# Altium PCB DoorComponantsTest.PcbDoc (part 2 of 2)
Units mil, origin at the board's own origin, x right, y up, seen from the top; angles counter-clockwise.
Board outline 6000 x 4000 mil, 2 copper layers (Top Layer, Bottom Layer); 88 components, 87 nets, 339 pads, 0 vias.
Unrouted connection lines stored in the file: 220.
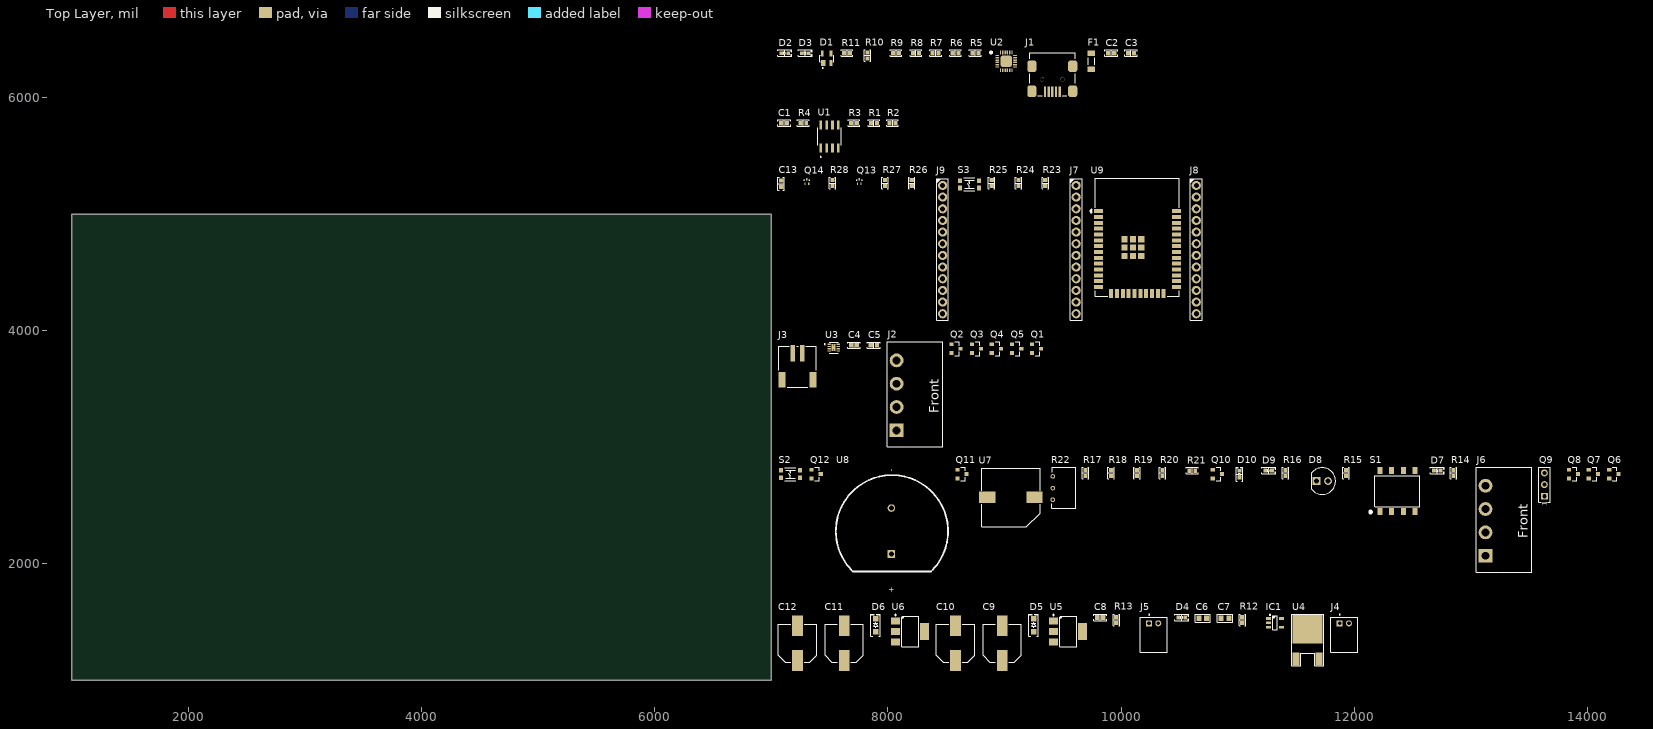
[diagram p0: Top Layer view]

## Part data (continued)
U5 U6: "IC REG LINEAR 3.3V 800MA SOT223", Current - Output=800mA, Current - Quiescent (Iq)="10 mA", manufacturer=STMicroelectronics, Operating Temperature="0°C ~ 125°C", Package / Case="TO-261-4, TO-261AA", Supplier Device Package=SOT-223, Supplier Part Number 1=497-1242-1-ND, Voltage - Input (Max)=15V, Voltage - Output (Min/Fixed)=3.3V, Voltage Dropout (Max)="1.2V @ 800mA", componentlink1description=Datasheet, componentlink1url=http://www.st.com/content/ccc/resource/technical/document/datasheet/99/3b/7d/91/91/51/4b/be/CD00000544.pdf/files/CD00000544.pdf/jcr:content/translations/en.CD00000544.pdf, componentlink2description="DigiKey Link", componentlink2url=https://www.digikey.com/en/products/detail/stmicroelectronics/LD1117S33TR/585766, lastupdated="2023-03-27 20:01:10", Lifecycle Status=Active, Minimum Order=1, Mounting Type="Surface Mount", Number of Regulators=1, Output Configuration=Positive, Output Type=Fixed, packaging=TapeAndReel, Part Number=LD1117S33TR, Part Status=Active, price=0.21, Protection Features="Over Current, Over Temperature", PSRR="75dB (120Hz)", series=-, Supplier 1=DigiKey
U7: "AUDIO MAGNETIC XDCR 3-7V SMD", Current - Supply=60mA, Frequency=2.4kHz, manufacturer="CUI Devices", Operating Mode="Single Tone", Operating Temperature="-30°C ~ 70°C", Ratings=Washable, Supplier Part Number 1=102-1266-1-ND, Voltage - Rated=5V, Voltage Range="3 ~ 7V", componentlink1description=Datasheet, componentlink1url=https://www.cuidevices.com/product/resource/digikeypdf/ct-1205h-smt-tr.pdf, componentlink2description="DigiKey Link", componentlink2url=http://digikey.com/product-detail/en/cui-devices/CT-1205H-SMT-TR/102-1266-1-ND/610974, Driver Circuitry="Transducer, Externally Driven", Height - Seated (Max)="0.406\" (10.30mm)", Input Type="Zero-Peak Signal", lastupdated="2020-04-24 00:37:20", Lifecycle Status=Active, Minimum Order=1, Mounting Type="Surface Mount", packaging=TapeAndReel, Part Number=CT-1205H-SMT-TR, Part Status=Active, Port Location=Top, price=0.95, series=CT, Size / Dimension="0.504\" L x 0.504\" W (12.80mm x 12.80mm)", Sound Pressure Level (SPL)="88dB @ 5V, 10cm", Supplier 1=DigiKey, Technology=Magnetic, Termination="Solder Pads"
U8: library part CMP-00124-2, "Buzzers Transducer, Externally Driven Piezo 10 V 11mA 92dB @ 10V, 10cm Through Hole PC Pins", Manufacturer Part Number 1=CEP-1112
U9: "No Description Available", Manufacturer Part Number=ESP32-WROOM-32D-N4, Mfr_Name="Espressif Systems", Copyright="Copyright (C) 2023 Ultra Librarian. All rights reserved.", Manufacturer_Part_Number="ESP32-WROOM-32 (8MB)", RefDes=RefDes, Type=DEV

## Nets (pads, with @x,y where several pads share a name; then routed paths per layer and width w, separated by ;. In a path a pad name is that pad's centre, name@x,y a point inside that pad or via, vN(x,y) a via of type N, cw(c..) or ccw(c..) an arc to the next point about the centre after c; other vN are vias at no path point)
3V: C2.2 C12.1 R5.1 R8.2 R9.2 R14.2 R15.2 R16.2 R17.2 R18.2 R21.2 U2.5 U2.6 U6.2 U6.4
5V: C1.2 R1.2 R2.2 R3.2 U1.8
12V: C6.2 J5.1 Q1.3 R19.2 S1.1 U4.1
+5: C8.2 IC1.2
+5V: C4.2 C5.2 C7.2 D5.1 D6.1 D8.2 IC1.3 J4.1 Q9.3 R20.2 R23.2 U4.3
BUZZER_EA: J7.6 Q11.1 R18.1 U9.14
CHR0: U2.15
CHR1: D2.2 U2.14
CHREN: D3.2 U2.13
CLK: J7.4 J8.3 U9.26
DSR: Q14.2 R10.1 R10.2 R27.1 U2.22
DTR: Q13.2 R7.1 R7.2 R28.1 U2.23
ESP_EN: J9.1 R24.1 S3.3 S3.4 U9.3
GND: C1.1 C2.1 C3.1 C4.1 C5.1 C6.1 C7.1 C8.1 C9.2 C10.2 C11.2 C12.2 C13.1 D1.1 J1.5 J4.2 J5.2 Q6.2 Q7.2 Q8.2 Q9.2 Q10.2 Q12.2 R4.1 R11.1 R13.1 R25.1 S2.1 S2.2 S3.1 S3.2 U1.4 U2.2 U2.25 U3.1 U3.4 U3.8 U4.2 U5.1 U6.1 U7.- U8.N U9.1 U9.15 U9.38 U9.39
GPIO0: J7.2 R26.2 U9.25
GPO: R1.1 U1.7
INFRA_R: J7.5 J8.4 Q9.1 U9.29
INFRA_T: J7.3 Q10.1 U9.24
IO35: J8.11 R23.1 R25.2 U9.7
LED_B_CTRL: D10.2 J7.9 Q8.1 U9.23
LED_G_CTRL: D9.2 J7.8 Q7.1 U9.13
LED_R_CTRL: D7.2 J7.7 Q6.1 U9.16
MISO: J8.2 U9.31
MOSI: J7.12 J8.1 U9.30
MPAP_C1: Q5.1 U3.6 U9.33
MPAP_C2: Q4.1 U3.5 U9.36
MPAP_C3: Q3.1 U9.37
MPAP_C4: Q2.1 U9.10
MTR_EA: J8.7 Q1.1 U3.7 U9.11
NetC9_1: C9.1 D5.2 U5.3
NetC11_1: C11.1 D6.2 U6.3
NetD1_3: D1.3 J1.2 U2.4
NetD1_4: D1.4 J1.3 U2.3
NetD2_1: D2.1 R9.1
NetD3_1: D3.1 R8.1
NetD4_2: D4.2 R12.2
NetD7_1: D7.1 S1.2
NetD8_1: D8.1 Q10.3
NetD9_1: D9.1 S1.3
NetD10_1: D10.1 S1.4
NetF1_1: F1.1 J1.1
NetIC1_1: IC1.1 R12.1
NetIC1_5: IC1.5 R13.2
NetJ2_1: J2.1 Q5.2
NetJ2_2: J2.2 Q4.2
NetJ2_3: J2.3 Q3.2
NetJ2_4: J2.4 Q2.2
NetJ3_1: J3.1 U3.2
NetJ3_2: J3.2 U3.3
NetJ6_1: J6.1 Q6.3
NetJ6_2: J6.2 Q7.3
NetJ6_3: J6.3 Q8.3
NetJ6_4: J6.4 S1.8
NetJ8_8: J8.8 U9.12
NetJ8_9: J8.9 U9.9
NetJ8_10: J8.10 U9.8
NetJ8_12: J8.12 U9.6
NetJ9_2: J9.2 U9.32
NetJ9_3: J9.3 U9.22
NetJ9_4: J9.4 U9.21
NetJ9_5: J9.5 U9.20
NetJ9_6: J9.6 U9.19
NetJ9_7: J9.7 U9.18
NetJ9_8: J9.8 U9.17
NetJ9_11: J9.11 U9.4
NetJ9_12: J9.12 U9.5
NetQ1_2: Q1.2 Q2.3 Q3.3 Q4.3 Q5.3
NetQ11_2: Q11.2 Q12.3
NetQ11_3: Q11.3 R22.1 U7.+ U8.P
NetQ12_1: Q12.1 R17.1 S2.3 S2.4
NetQ13_1: Q13.1 R27.2
NetQ13_3: Q13.3 R26.1
NetQ14_1: Q14.1 R28.2
NetQ14_3: Q14.3
NetR4_2: R4.2 U1.1
NetR5_2: R5.2 U2.9
NetR6_1: R6.1 R11.2 U2.7 U2.8
NetR14_1: R14.1 S1.7
NetR15_1: R15.1 S1.6
NetR16_1: R16.1 S1.5
NetR19_1: R19.1 R20.1 R21.1 R22.2
RX_ESP: J9.9 U2.21 U9.34
SCL: J7.11 J8.6 R2.1 U1.6 U9.28
SDA: J7.10 J8.5 R3.1 U1.5 U9.27
TX_ESP: J9.10 U2.20 U9.35
vBus: C3.2 D1.2 D4.1 F1.2 IC1.4 R6.2
Vesp: C10.1 C13.2 J7.1 R24.2 U5.2 U5.4 U9.2
pads on no net: J1.4 J1.M J1.S J3.3 J3.4 R22.3 U1.2 U1.3 U2.1 U2.10 U2.11 U2.12 U2.16 U2.17 U2.18 U2.19 U2.24 U3.9 U3.9_1 U3.9_2 U9.40 U9.41 U9.42 U9.43 U9.44 U9.45 U9.46 U9.47

## Text inside footprints (layer, text, board x,y; h text height)
J2: Top Overlay "Front" at 8437,3293 h80 r90
J6: Top Overlay "Front" at 13487,2218 h80 r90
Q9: Top Overlay "1" at 13650,2500 h40 r90
U8: Top Overlay "-" at 8050,2790 h50.13 r90; Top Overlay "+" at 8048.57,1747.02 h50.17 r90